# Altium PCB ChargeLevel.PcbDoc
Units mm, origin at the board's own origin, x right, y up, seen from the top; angles counter-clockwise.
Board outline 37 x 26 mm, 2 copper layers (Top Layer, Bottom Layer); 22 components, 12 nets, 57 pads, 9 vias.
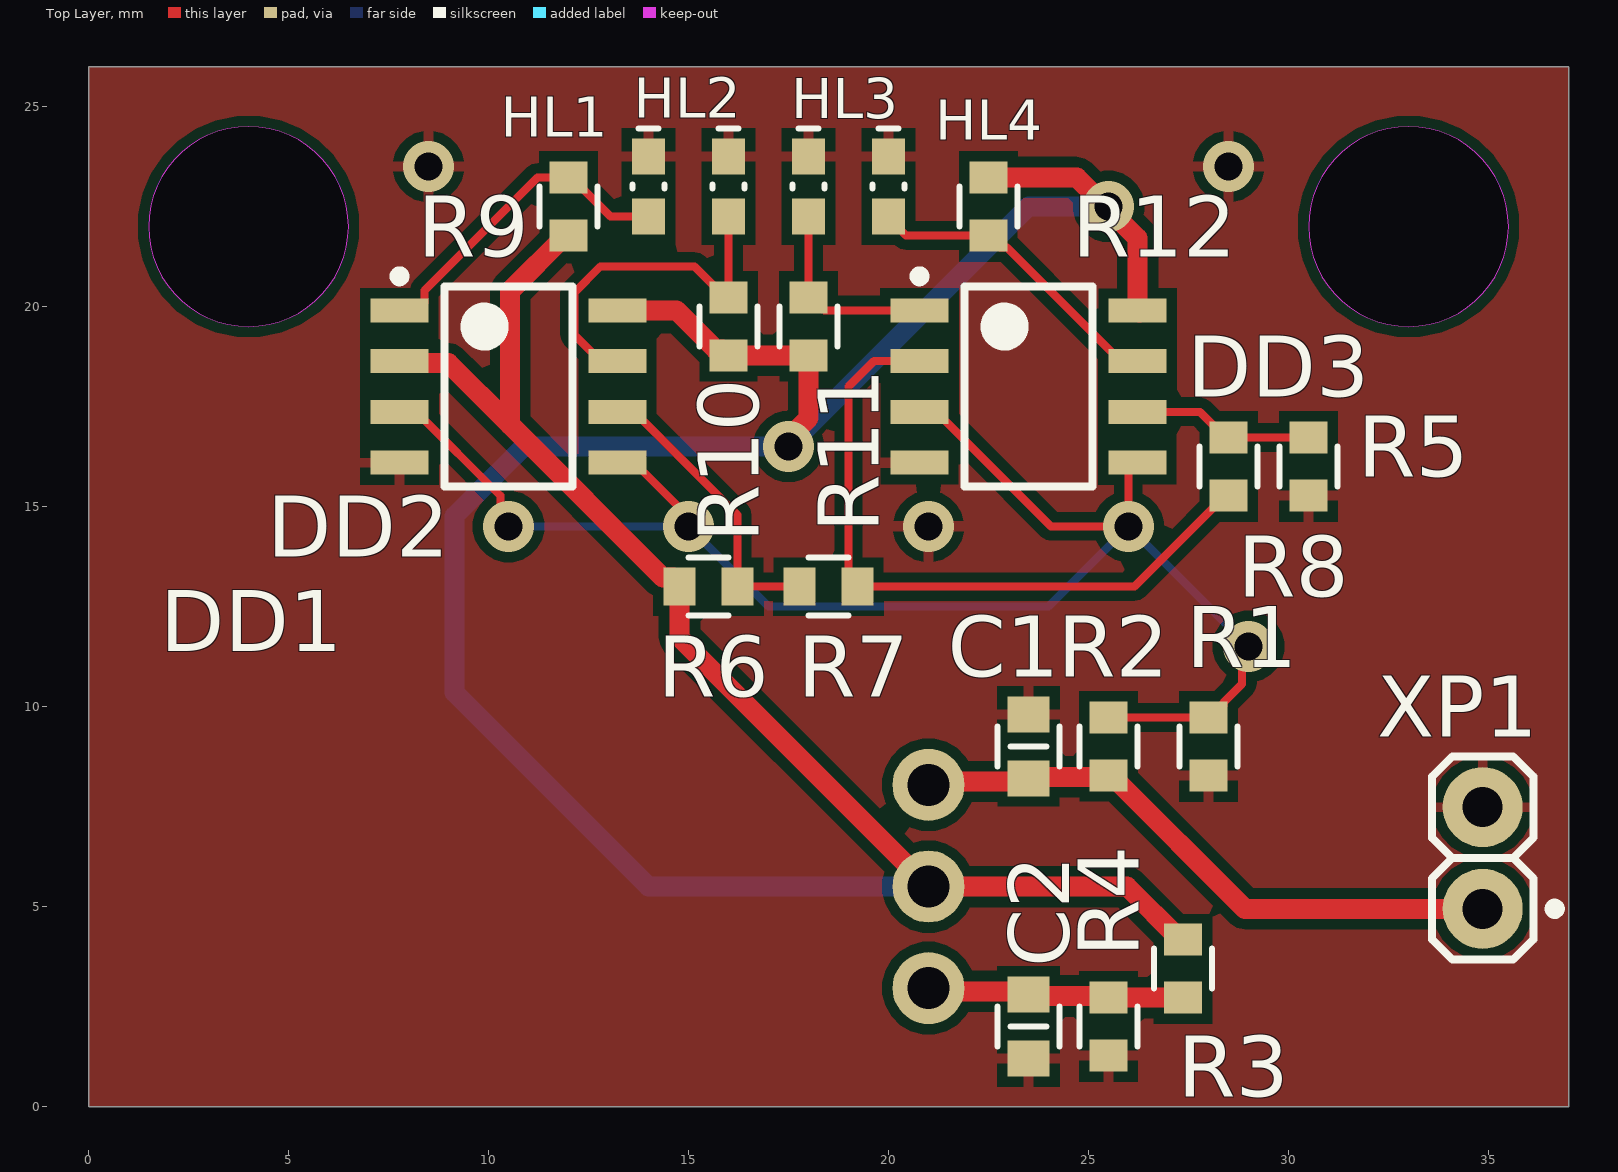
[diagram p0: Top Layer view]
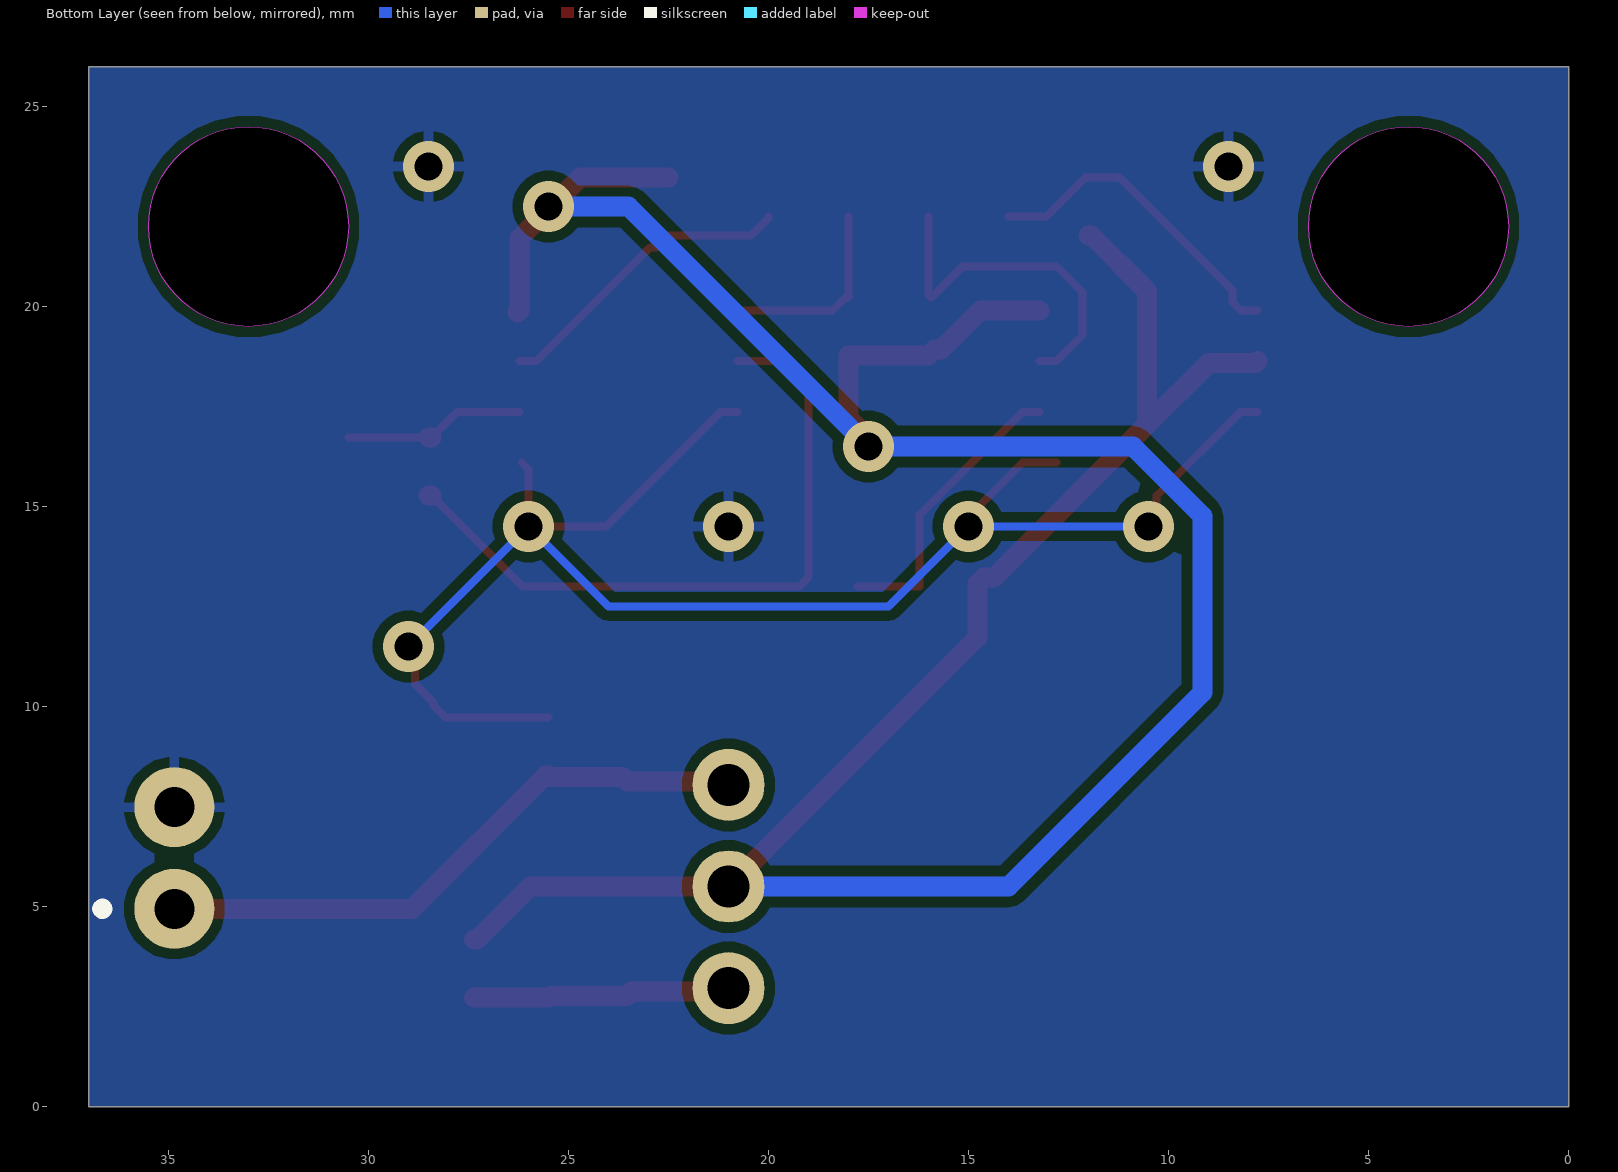
[diagram p1: Bottom Layer view, seen from below]

## Layer stack, top to bottom
Top Solder: solder mask 0.0102, Solder Resist, Dk 3.5
Top Layer: signal copper 0.0356
Dielectric 1: dielectric 0.32, FR-4, Dk 4.8
Bottom Layer: signal copper 0.0356
Bottom Solder: solder mask 0.0102, Solder Resist, Dk 3.5

## Board outline
0,0 0,26 37,26 37,0
cut-out: 30.5,22 ccw(c33,22) 33,19.5 ccw(c33,22) 35.5,22 ccw(c33,22) 33,24.5 ccw(c33,22)
cut-out: 1.5,22 ccw(c4,22) 4,19.5 ccw(c4,22) 6.5,22 ccw(c4,22) 4,24.5 ccw(c4,22)

## Design rules (kind name [scope] priority, off if disabled: settings)
Clearance [All] p1: gap=0.254 ignorepadtopadclearanceinfootprint=FALSE
PolygonConnect [All] p1: connectstyle=Relief reliefconductorwidth=0.254 reliefentries=4 polygonreliefangle="90 Angle" airgapwidth=0.254
RoutingVias [All] p1: holewidth=0.711 width=1.27 viastyle="Through Hole" minholewidth=0.711 minwidth=1.27 maxholewidth=0.711 maxwidth=1.27
SolderMaskExpansion [All] p1: expansion=0.102 istentingtop=FALSE
SupplyNets "Schematic Supply Nets" [InNet('GND')] p1: voltage=0.000
Width [All] p1: maxlimit=1 minlimit=0.2 preferedwidth=0.5 minimp=50.000000 maximp=50.000000 favimp=50.000000
30 further rules are at their usual default settings.

## Classes and differential pairs
component class ChargeLevel: C1 C2 DD1 DD2 DD3 HL1 HL2 HL4 R1 R2 R3 R4 R5 R6 R7 R8 R9 R10 R11 R12

## Components (designator, comment, footprint, x,y, rotation, side; value= is the part's Value field where it differs from the comment)
C1 "Capacitor" 0603C 23.5,9 r90 top value="0,1 мк"
C2 "Capacitor" 0603C 23.5,2 r270 top value="1 мк"
DD1 "LM317" TO-220 21,5.5 r90 top
DD2 "LM393" SOIC-8 10.5,18 r0 top
DD3 "LM393" SOIC-8 23.5,18 r0 top
HL1 "LED 0603 GREEN" 0603D_green 14,23 r270 top value=Зелёный
HL2 "LED 0603 YELLOW" 0603D_yellow 16,23 r270 top value=Жёлтый
HL3 "LED 0603 YELLOW" 0603D_yellow 18,23 r270 top value=Жёлтый
HL4 "LED 0603 RED" 0603D_red 20,23 r270 top value=Красный
R1 "Resistor" 0603R 28,9 r270 top value="100 к"
R2 "Resistor" 0603R 25.5,9 r90 top value="75 к"
R3 "Resistor" 0603R 27.365,3.445 r90 top value="1,0 к"
R4 "Resistor" 0603R 25.5,2 r90 top value="6,2 к"
R5 "Resistor" 0603R 30.5,16 r90 top value="130 к"
R6 "Resistor" 0603R 15.5,13 r180 top value="10 к"
R7 "Resistor" 0603R 18.5,13 r180 top value="10 к"
R8 "Resistor" 0603R 28.5,16 r270 top value="10 к"
R9 "Resistor" 0603R 12,22.5 r270 top value=470
R10 "Resistor" 0603R 16,19.5 r270 top value=470
R11 "Resistor" 0603R 18,19.5 r270 top value=470
R12 "Resistor" 0603R 22.5,22.5 r90 top value=470
XP1 "PLS-2" PLS2 34.855,4.943 r180 top

## Footprints (in the part's own frame and the unit in brackets; to place one, negate y for a bottom-side part, rotate by r counter-clockwise, add the part's x,y. Pads: shape width x height; smd on the part's side, far side on the other; paste and mask are expansions set on the pad)
0603C [mm] "Chip Resistor, 2-Leads, Body 1,40x0,80mm, IPC Medium Density"
  rect 0.9x1.05 smd: 1(-0.8,0) 2(0.8,0)
  silkscreen extent -0.5,-0.77 0.5,0.77, body extent -0.85,-0.45 0.85,0.45, height 0.9
0603D_green [mm]
  rect 0.91x0.83 smd: 1(0.75,0) 2(-0.75,0)
  silkscreen extent -1.45,-0.4 0.05,0.4, body extent -0.8,-0.41 0.8,0.41, height 0.71
0603D_red [mm]
  rect 0.91x0.83 smd: 1(0.75,0) 2(-0.75,0)
  silkscreen extent -1.45,-0.4 0.05,0.4, body extent -0.8,-0.41 0.8,0.41, height 0.71
0603D_yellow [mm]
  rect 0.91x0.83 smd: 1(0.75,0) 2(-0.75,0)
  silkscreen extent -1.45,-0.4 0.05,0.4, body extent -0.8,-0.41 0.8,0.41, height 0.71
0603R [mm] "Chip Resistor, 2-Leads, Body 1.60x0.85mm, IPC Medium Density"
  rect 0.8x0.95 smd: 1(-0.725,0) 2(0.725,0)
  silkscreen extent -0.5,-0.72 0.5,0.72, body extent -0.8,-0.4 0.8,0.4, height 0.45
PLS2 [mm]
  round 2 hole 1: 1(0,0) 2(0,-2.54)
  silkscreen extent -1.92,-3.81 1.27,1.27, body extent -1.27,-3.81 1.27,1.27, height 8.44
SOIC-8 [mm] "for operational amplifier"
  rect 1.45x0.6 smd: 1(-2.725,1.905) 2(-2.725,0.635) 3(-2.725,-0.635) 4(-2.725,-1.905) 5(2.725,-1.905) 6(2.725,-0.635) 7(2.725,0.635) 8(2.725,1.905)
  silkscreen extent -2.85,-2.5 1.6,2.88, body extent -3,-2.5 3,2.5, height 1.75
TO-220 [mm]
  round 1.8 hole 1.05: 1(-2.54,0) 2(0,0) 3(2.54,0)
  body extent -5.13,-0.26 5.13,19.48, height 4.44

## Part data
C1 C2: library part "0,1 мк", "Конденсатор", Part Number=Capacitor
DD2 DD3: "Двойной маломощный компаратор напряжения", Package="SOIC-8 Texas Instruments", Check_prices=https://www.snapeda.com/parts/LM393D/Texas+Instruments/view-part/?ref=eda, MF="Texas Instruments", MP=LM393D, Part Number=LM393, SnapEDA_Link=https://www.snapeda.com/parts/LM393D/Texas+Instruments/view-part/?ref=snap, Автор=rreali
HL1: "Светодиод 0603 Зелёный", Part Number="LED 0603 GREEN", Автор=rreali
HL2 HL3: "Светодиод 0603 Жёлтый", Part Number="LED 0603 YELLOW", Автор=rreali
HL4: "Светодиод 0603 Красный", Part Number="LED 0603 RED", Автор=rreali
R1: library part Resistor_100k_1_0603, "Резистор номиналом 100 кОм 1%", Tolerance=1%, Part Number=Resistor_100k_1_0603
R2: library part Resistor_75k_1_0603, "Резистор номиналом 75 кОм 1%", Tolerance=1%, Part Number=Resistor_75k_1_0603
R3: library part Resistor_1.0k_1_0603, "Резистор номиналом 1,0 кОм 1%", Tolerance=1%, Part Number=Resistor_1.0k_1_0603
R4: library part Resistor_6.2k_1_0603, "Резистор номиналом 6,2 кОм 1%", Tolerance=1%, Part Number=Resistor_6.2k_1_0603
R5: library part Resistor_130k_1_0603, "Резистор номиналом 130 кОм 1%", Tolerance=1%, Part Number=Resistor_130k_1_0603
R6 R7 R8: library part Resistor_10k_1_0603, "Резистор номиналом 10 кОм 1%", Tolerance=1%, Part Number=Resistor_10k_1_0603
R9 R10 R11 R12: library part Resistor_470_1_0603, "Резистор номиналом 470 Ом 1%", Tolerance=1%, Part Number=Resistor_470_1_0603
XP1: "Гребенка 2 пина", Value1=+BATT, Value2=GND, Part Number=PLS-2, System=Connector, Автор=rreali

## Via types
v1: diameter 1.27, hole 0.711, Top Layer to Bottom Layer, 9 vias

## Nets (pads, with @x,y where several pads share a name; then routed paths per layer and width w, separated by ;. In a path a pad name is that pad's centre, name@x,y a point inside that pad or via, vN(x,y) a via of type N, cw(c..) or ccw(c..) an arc to the next point about the centre after c; other vN are vias at no path point)
9V: DD1.2 DD2.2 DD2.8 DD3.8 R3.2 R6.2 R9.2 R10.2 R11.2 R12.2 | length 83.5
  Top Layer w0.5: DD2.2 7.825,18.585 8.997,18.585 10.541,17.041 ; R9.2 11.925,21.775 10.541,20.391 10.541,17.041 ; DD2.8 14.7,19.905 15.68,18.925 15.85,18.925 R10.2 R11.2 18,17.208 17.5,16.708 v1(17.5,16.5) ; R12.2 24.707,23.225 26.225,21.707 DD3.8 DD3.8@26.275,19.855 ; R3.2 27.29,4.17 25.96,5.5 DD1.2 14.775,11.725 14.775,13.075 14.625,13.225 14.357,13.225 10.541,17.041
  Bottom Layer w0.5: DD1.2 14,5.5 9.152,10.348 9.152,14.762 10.889,16.5 v1(17.5,16.5) 23.5,22.5 v1(25.5,22.5)
+BATT: C1.1 DD1.3 R2.1 XP1.1 | length 15.3
  Top Layer w0.5: DD1.3 21.08,8.12 23.527,8.12 23.645,8.237 R2.1@25.5,8.237 ; R2.1 25.575,8.275 28.907,4.943 XP1.1
GND: C1.2 C2.2 DD2.4 DD3.4 HL1.2 HL2.2 HL3.2 HL4.2 R1.2 R4.1 R5.1 XP1.2
  other v1: 21,14.5 8.5,23.5 28.5,23.5
MEASURE: DD2.3 DD2.5 DD3.3 DD3.5 R1.1 R2.2 | length 41.5
  Top Layer w0.2: DD2.3 8.2,17.365 10.295,15.27 10.295,14.705 v1(10.5,14.5) ; DD2.5@12.8,16.095 DD2.5 13.65,16.095 15,14.745 v1(15,14.5) ; DD3.3 21.2,17.365 24.065,14.5 v1(26,14.5) 26,15.933 DD3.5@26.163,16.095 ; R2.2 R1.1 28.075,9.725 28.375,10.025 28.375,10.1 28.84,10.565 28.84,11.34 v1(29,11.5)
  Bottom Layer w0.2: v1(10.5,14.5) v1(15,14.5) 17,12.5 24,12.5 v1(26,14.5) v1(29,11.5)
NetC2_1: C2.1 DD1.1 R3.1 R4.2 | length 6.5
  Top Layer w0.5: DD1.1 21.08,2.88 23.42,2.88 C2.1 23.538,2.763 25.462,2.763 R4.2 25.502,2.723 27.362,2.723 R3.1
NetDD2_1: DD2.1 HL1.1 R9.1 | length 8.2
  Top Layer w0.2: DD2.1 8.2,19.905 8.4,20.105 8.4,20.4 11.225,23.225 R9.1 12.075,23.225 13.05,22.25 HL1.1
NetDD2_6: DD2.6 R6.1 R7.2 | length 7.4
  Top Layer w0.2: DD2.6 13.65,17.365 16.225,14.79 R6.1 R7.2
NetDD2_7: DD2.7 HL2.1 R10.1 | length 8.8
  Top Layer w0.2: DD2.7 12.8,18.635 12.146,19.289 12.146,20.352 12.794,21 15.15,21 15.925,20.225 16,20.3 HL2.1
NetDD3_1: DD3.1 HL3.1 R11.1 | length 4.9
  Top Layer w0.2: HL3.1 R11.1 18.075,20.225 18.395,19.905 DD3.1
NetDD3_2: DD3.2 R7.1 R8.2 | length 17.3
  Top Layer w0.2: DD3.2 19.635,18.635 19,18 19,13.225 R7.1 26.15,13 R8.2@28.425,15.275
  Top Layer w0.5: R8.2@28.425,15.275 R8.2
NetDD3_6: DD3.6 R5.2 R8.1 | length 4.5
  Top Layer w0.2: DD3.6 27.785,17.365 R8.1@28.425,16.725 ; R8.1 R5.2
  Top Layer w0.5: R8.1@28.425,16.725 R8.1
NetDD3_7: DD3.7 HL4.1 R12.1 | length 7.7
  Top Layer w0.2: HL4.1 20,22.21 20.435,21.775 R12.1 22.8,21.475 22.96,21.475 25.8,18.635 DD3.7

## Polygon pours and split planes (outlines as drawn)
GND on Bottom Layer "GND_L02_P000" (solid, pour order 0): 0,26 37,26 37,0 0,0
GND on Top Layer "GND_L01_P002" (solid, pour order 2): 37,0 0,0 0,26 37,26

## Silkscreen, mask and mechanical layers (free items; w line width, h text height)
Mechanical 1:
  circle w0.254: c33,22 r2.5
  circle w0.254: c4,22 r2.5
  pour cut-out: 30.5,22 ccw(c33,22) 33,19.5 ccw(c33,22) 35.5,22 ccw(c33,22) 33,24.5 ccw(c33,22)
  pour cut-out: 30.5,22 ccw(c33,22) 33,19.5 ccw(c33,22) 35.5,22 ccw(c33,22) 33,24.5 ccw(c33,22)
  pour cut-out: 1.5,22 ccw(c4,22) 4,19.5 ccw(c4,22) 6.5,22 ccw(c4,22) 4,24.5 ccw(c4,22)
  lines w0.254: 0,0 36,0 37,0 37,20 37,25 37,26 36,26 26.25,26 8.75,26 0,26 0,19 0,0